# Altium PCB PCB1.PcbDoc
Units mil, origin at the board's own origin, x right, y up, seen from the top; angles counter-clockwise.
Board outline 6000 x 4000 mil, 2 copper layers (Top Layer, Bottom Layer); 48 components, 45 nets, 195 pads, 10 vias.
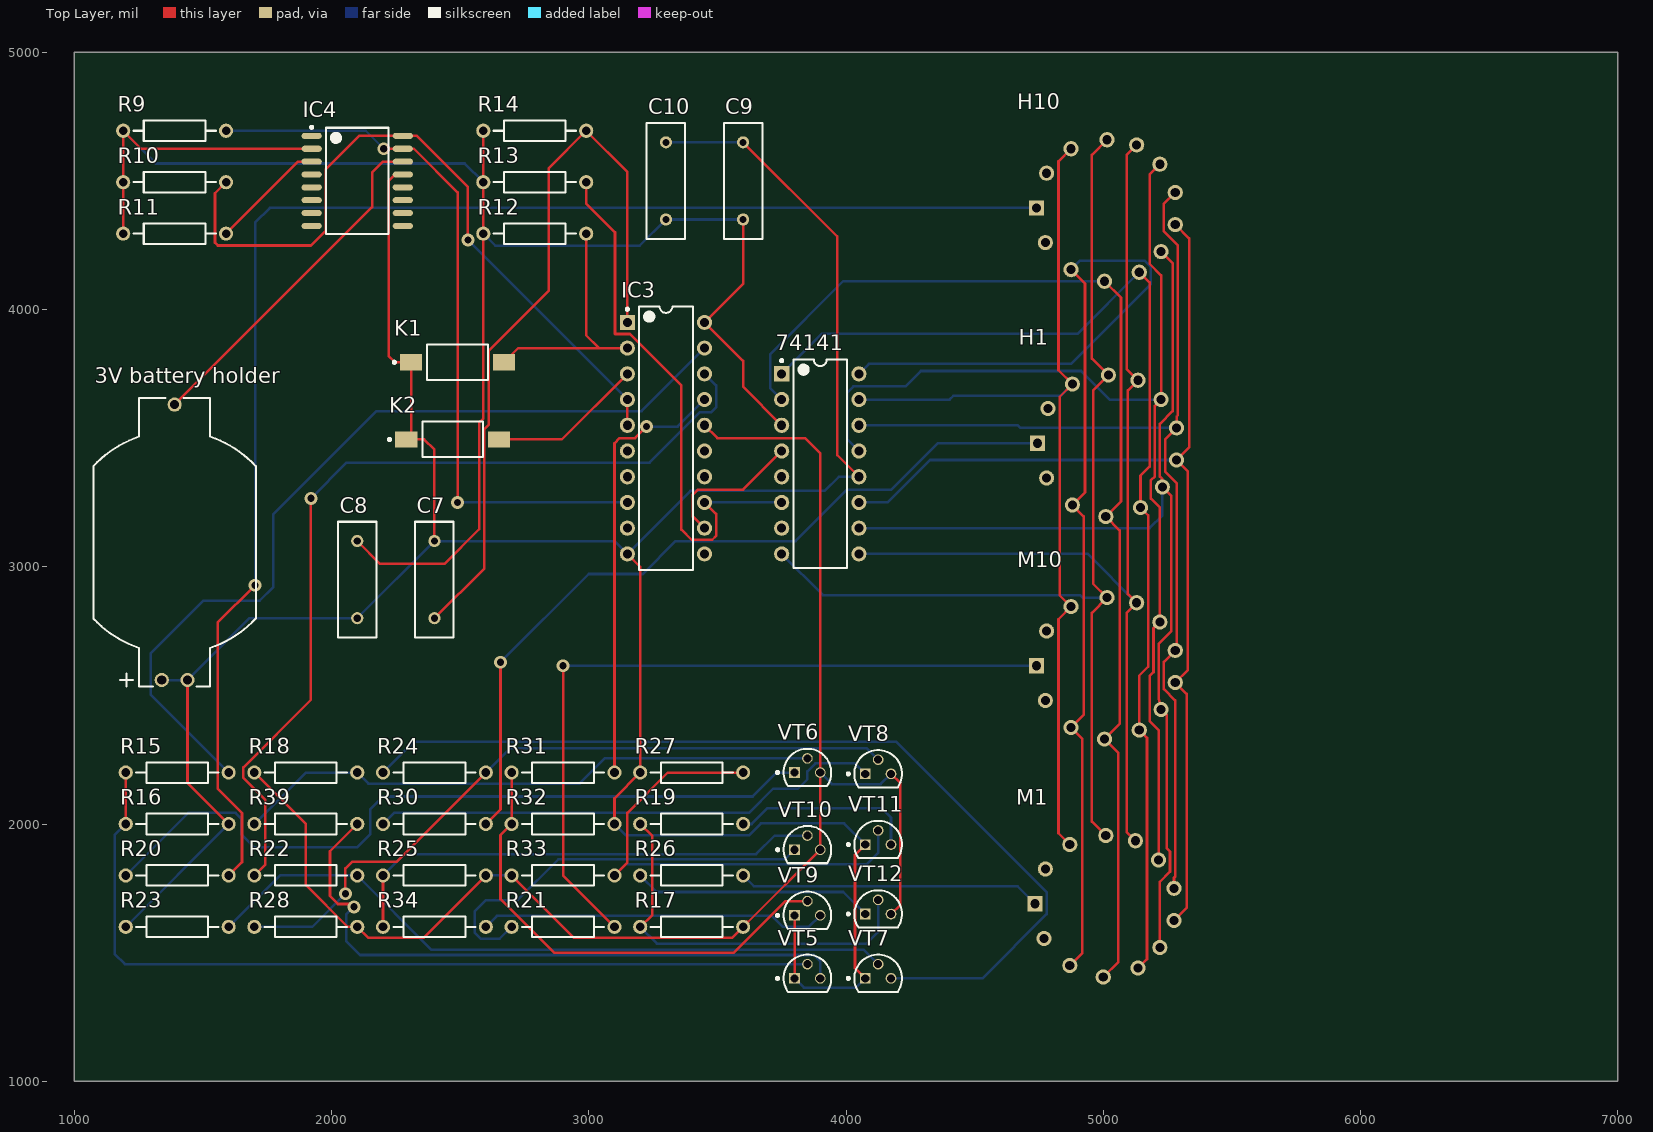
[diagram p0: Top Layer view]
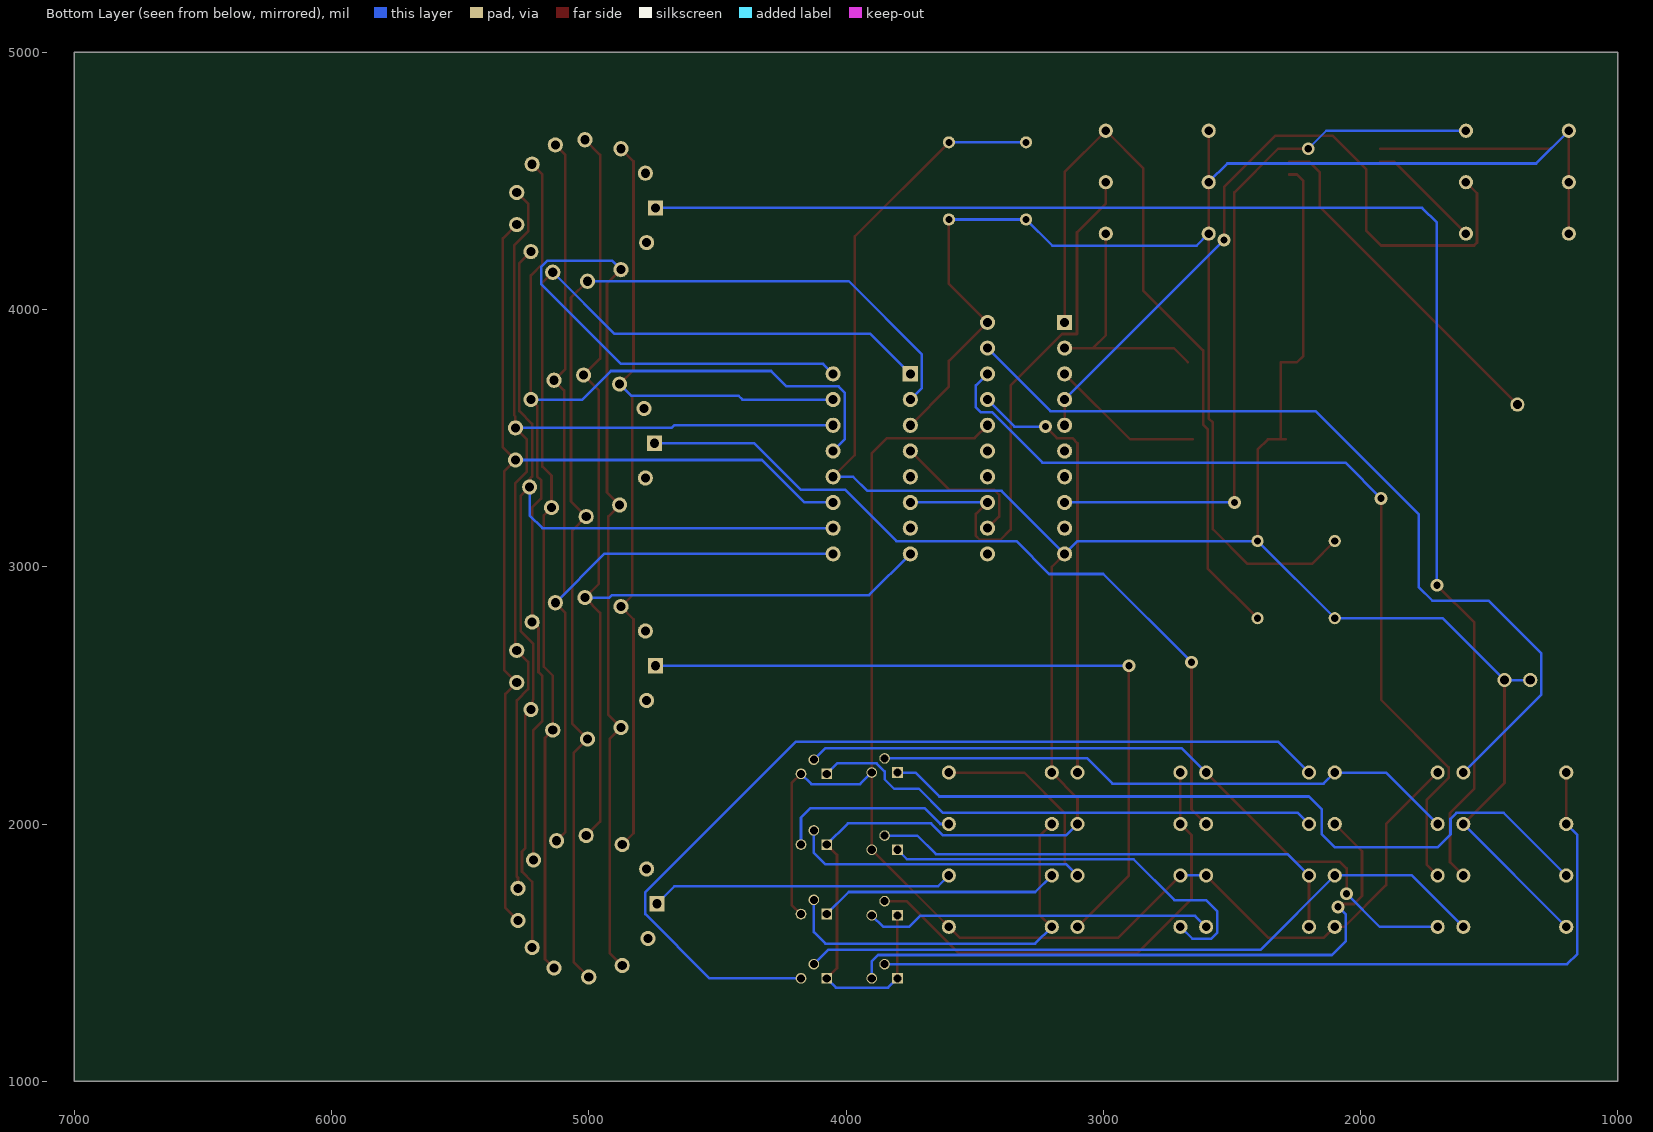
[diagram p1: Bottom Layer view, seen from below]

## Layer stack, top to bottom
Top Solder: solder mask 0.4, Solder Resist, Dk 3.5
Top Layer: signal copper 1.4
Dielectric 1: dielectric 12.6, FR-4, Dk 4.8
Bottom Layer: signal copper 1.4
Bottom Solder: solder mask 0.4, Solder Resist, Dk 3.5

## Board outline
1000,1000 7000,1000 7000,5000 1000,5000

## Design rules (kind name [scope] priority, off if disabled: settings)
Clearance [All] p1: gap=10 ignorepadtopadclearanceinfootprint=FALSE except(0: Arc-Hole Track-Hole SMDPad-Hole THPad-Hole Via-Hole Fill-Hole Poly-Hole Region-Hole Text-Hole)
PolygonConnect [All] p1: connectstyle=Relief reliefconductorwidth=10 reliefentries=4 polygonreliefangle="90 Angle" airgapwidth=10
RoutingVias [All] p1: holewidth=28 width=50 viastyle="Through Hole" minholewidth=28 minwidth=50 maxholewidth=28 maxwidth=50
SolderMaskExpansion [All] p1: expansion=4 istentingtop=FALSE
Width [All] p1: maxlimit=10 minlimit=10 preferedwidth=10
30 further rules are at their usual default settings.

## Classes and differential pairs
net class tb[0..9]: tb0 tb1 tb2 tb3 tb4 tb5 tb6 tb7 tb8 tb9

## Components (designator, comment, footprint, x,y, rotation, side; value= is the part's Value field where it differs from the comment)
"3V battery holder" "CR2032" RENA-HU2032-LF_V 1390,3095 r90 top
74141 "NIXIE_DRIVER_V1" DIP-16 3900,3400 r0 top
C7 "Cap" RAD-0.3 2400,2950 r270 top value=0.1µF
C8 "Cap" RAD-0.3 2100,2950 r90 top value=0.1µF
C9 "Cap" RAD-0.3 3600,4500 r270 top value=0.1µF
C10 "Cap" RAD-0.3 3300,4500 r270 top value=0.1µF
H1 "Header 13" HDR1X13 4800,3930 r270 top
H10 "Header 13" HDR1X13 4795,4845 r270 top
IC3 "ATtiny2313-20PU" 20P3 3300,3500 r0 top
IC4 "DS3231S" W16-H2_L 2100,4500 r0 top
K1 "mode" TECO-FSMSM-2_V 2490,3795 r0 top
K2 "set" TECO-FSMSM-2_V 2470.91,3495 r0 top
M1 "Header 13" HDR1X13 4790,2140 r270 top (schematic designator m1)
M10 "Header 13" HDR1X13 4795,3065 r270 top (schematic designator m10)
R9 "Res2" AXIAL-0.4 1390,4695 r180 top value=5.1K
R10 "Res2" AXIAL-0.4 1390,4495 r180 top value=5.1K
R11 "Res2" AXIAL-0.4 1390,4295 r180 top value=5.1K
R12 "Res2" AXIAL-0.4 2790,4295 r180 top value=1K
R13 "Res2" AXIAL-0.4 2790,4495 r180 top value=1K
R14 "Res2" AXIAL-0.4 2790,4695 r180 top value=1K
R15 "Res2" AXIAL-0.4 1400,2200 r0 top value=10K
R16 "Res2" AXIAL-0.4 1400,2000 r180 top value=10K
R17 "Res2" AXIAL-0.4 3400,1600 r0 top value=10K
R18 "Res2" AXIAL-0.4 1900,2200 r180 top value=10K
R19 "Res2" AXIAL-0.4 3400,2000 r180 top value=1M
R20 "Res2" AXIAL-0.4 1400,1800 r180 top value=10K
R21 "Res2" AXIAL-0.4 2900,1600 r180 top value=10K
R22 "Res2" AXIAL-0.4 1900,1800 r180 top value=10K
R23 "Res2" AXIAL-0.4 1400,1600 r0 top value=10K
R24 "Res2" AXIAL-0.4 2400,2200 r0 top value=1M
R25 "Res2" AXIAL-0.4 2400,1800 r0 top value=10K
R26 "Res2" AXIAL-0.4 3400,1800 r180 top value=10K
R27 "Res2" AXIAL-0.4 3400,2200 r0 top value=10K
R28 "Res2" AXIAL-0.4 1900,1600 r0 top value=10K
R30 "Res2" AXIAL-0.4 2400,2000 r180 top value=10K
R31 "Res2" AXIAL-0.4 2900,2200 r0 top value=10K
R32 "Res2" AXIAL-0.4 2900,2000 r180 top value=10K
R33 "Res2" AXIAL-0.4 2900,1800 r180 top value=10K
R34 "Res2" AXIAL-0.4 2400,1600 r180 top value=1M
R39 "Res2" AXIAL-0.4 1900,2000 r180 top value=1M
VT5 "MPSA42" ONSC-TO-92-3-29-11 3850,1400 r0 top
VT6 "MPSA92" ONSC-TO-92-3-29-11 3850,2200 r0 top
VT7 "MPSA42" ONSC-TO-92-3-29-11 4125,1400 r0 top
VT8 "MPSA92" ONSC-TO-92-3-29-11 4125,2195 r0 top
VT9 "MPSA42" ONSC-TO-92-3-29-11 3850,1645 r0 top
VT10 "MPSA92" ONSC-TO-92-3-29-11 3850,1900 r0 top
VT11 "MPSA42" ONSC-TO-92-3-29-11 4125,1920 r0 top
VT12 "MPSA92" ONSC-TO-92-3-29-11 4125,1650 r0 top

## Footprints (in the part's own frame and the unit in brackets; to place one, negate y for a bottom-side part, rotate by r counter-clockwise, add the part's x,y. Pads: shape width x height; smd on the part's side, far side on the other; paste and mask are expansions set on the pad)
20P3 [mm] "DIP, 20-Pin, Row Spacing 7.62 mm, Pitch 2.54 mm"
  rect 1.5x1.5 hole 0.9: 1(-3.81,11.43)
  round 1.5 hole 0.9: 2(-3.81,8.89) 3(-3.81,6.35) 4(-3.81,3.81) 5(-3.81,1.27) 6(-3.81,-1.27) 7(-3.81,-3.81) 8(-3.81,-6.35) 9(-3.81,-8.89) 10(-3.81,-11.43) 11(3.81,-11.43) 12(3.81,-8.89) 13(3.81,-6.35) 14(3.81,-3.81) 15(3.81,-1.27) 16(3.81,1.27) 17(3.81,3.81) 18(3.81,6.35) 19(3.81,8.89) 20(3.81,11.43)
  silkscreen extent -3.93,-13 2.65,13, body extent -3.6,-12.95 3.6,12.95, height 5.08
AXIAL-0.4 [mm] "Axial Device, Thru-Hole; 2 Leads; 0.4 in Pin Spacing"
  round 1.4 hole 0.85: 1(-5.08,0) 2(5.08,0)
  silkscreen extent -4.06,-1.02 4.06,1.02
DIP-16 [mm] "DIP; 16 Leads; Row Spacing 7.62 mm; Pitch 2.54 mm"
  rect 1.5x1.5 hole 0.9: 1(-3.81,8.89)
  round 1.5 hole 0.9: 2(-3.81,6.35) 3(-3.81,3.81) 4(-3.81,1.27) 5(-3.81,-1.27) 6(-3.81,-3.81) 7(-3.81,-6.35) 8(-3.81,-8.89) 9(3.81,-8.89) 10(3.81,-6.35) 11(3.81,-3.81) 12(3.81,-1.27) 13(3.81,1.27) 14(3.81,3.81) 15(3.81,6.35) 16(3.81,8.89)
  silkscreen extent -3.93,-10.3 2.65,10.31, body extent -3.6,-10.28 3.6,10.28, height 5.08
HDR1X13 [mm] "Connector; Header; 13 Position"
  rect 1.5x1.5 hole 0.9: 1(11.43,-1.397)
  round 1.5 hole 0.9: 2(8.001,-0.381) 3(5.588,2.032) 4(4.699,5.588) 5(5.207,8.509) 6(7.112,10.795) 7(9.906,12.319) 8(13.081,12.319) 9(15.748,10.922) 10(17.78,8.763) 11(18.669,5.334) 12(17.526,2.032) 13(14.859,-0.508)
ONSC-TO-92-3-29-11 [mm] "TO, 3-Leads, Body Dia 4.7mm, Pitch 1.27mm"
  rect 1.05x1.05 hole 0.8: 1(-1.27,0)
  round 1.05 hole 0.8: 2(0,1.397) 3(1.27,0)
  silkscreen extent -3.07,-1.34 2.35,2.35, body extent -2.35,-1.33 2.36,2.36, height 7.87
RAD-0.3 [mm] "Radial Cap, Thru-Hole; 2 Leads; 0.3 in Pin Spacing"
  round 1.2 hole 0.7: 1(-3.81,0) 2(3.81,0)
  silkscreen extent -5.71,-1.91 5.71,1.91
RENA-HU2032-LF_V [mm] "THD, 3-Leads, Body 28.5x16.05mm"
  round 1.4 hole 0.9: 1(-13.6,1.27) 2(-13.6,-1.27) 3(13.6,0)
  silkscreen extent -14.25,-8.03 14.25,8.03, body extent -14.25,-8.03 14.25,8.03, height 5.35
TECO-FSMSM-2_V [mm] "SMD, 2-Leads, Body 6x3.5mm, Pitch 9.19mm"
  rect 2.2x1.6 smd: 1(-4.595,0)
  rect 2.18x1.6 smd: 2(4.595,0)
  silkscreen extent -6.37,-1.75 3,1.75, body extent -4.98,-1.75 4.98,1.75, height 4.4
W16-H2_L [mm] "SOIC, 16-Leads, Body 10.3x7.5mm, Pitch 1.27mm, IPC High Density"
  oval 2x0.6 smd: 1(-4.5,4.445) 2(-4.5,3.175) 3(-4.5,1.905) 4(-4.5,0.635) 5(-4.5,-0.635) 6(-4.5,-1.905) 7(-4.5,-3.175) 8(-4.5,-4.445) 9(4.5,-4.445) 10(4.5,-3.175) 11(4.5,-1.905) 12(4.5,-0.635) 13(4.5,0.635) 14(4.5,1.905) 15(4.5,3.175) 16(4.5,4.445)
  silkscreen extent -4.62,-5.25 3.1,5.42, body extent -3.8,-5.25 3.8,5.25, height 2.65

## Part data
"3V battery holder": library part CMP-2000-06429-1, "Coin Cell Battery Holder, CR2032, Horizontal, -40 to 100 degC, 3-Pin THD, RoHS, Tray", Manufacturer=Renata, Package Description="3-Pin Through Hole Device, Body 28.5 x 16.05 mm", Package Reference=HU2032-LF, Battery Cell Size=20mm, Brand=Renata, Contact Plating=Nickel, Datasheet URL=http://www.renata.com/fileadmin/downloads/productsheets/battery_holders/HU2032-LF.pdf, Datasheet Version="Rev. 2, 09/2010", Dimensions=28.5mmx16.1mmx5.2mm, Factory Pack Quantity=500, Manufacturer URL=http://www.renata.com/, Material=LiquidCrystalPolymer(LCP), Mounting Style=ThroughHole, Mounting Technology=ThroughHole, Product=BatteryHolders, Product Category=CoinCellBatteryHolders, RoHS=Details, Termination Style=SolderPins, Type=BatteryHolder
C7 C8 C9 C10: "Capacitor", LatestRevisionDate=17-Jul-2002, LatestRevisionNote="Re-released for DXP Platform.", PackageDescription="Radial Cap, Thru-Hole; 2 Leads; 0.3 in Pin Spacing", PackageReference=RAD-0.3, Published=8-Jun-2000, Publisher="Altium Limited"
H1 H10 M1 M10: "Header, 13-Pin", LatestRevisionDate=17-Jul-2002, LatestRevisionNote="Re-released for DXP Platform.", Publisher="Altium Limited"
IC3: library part CMP-0093-00018-2, "Low Power tinyAVR® 8-Bit Microcontroller, 2.7-5.5V, 20MHz, 2K Flash Memory, Industrial Grade (-40°C to 85°C), 20-Lead PDIP, Pb-Free", Code_JEDEC=MS-001-AD, ComponentLink1Description="Manufacturer URL", ComponentLink1URL=http://www.atmel.com/, ComponentLink2Description="ATtiny2313 Datasheet", ComponentLink2URL=http://www.atmel.com/dyn/resources/prod_documents/doc2543.pdf, ComponentLink3Description="ATtiny2313 Summary", ComponentLink3URL=http://www.atmel.com/dyn/resources/prod_documents/doc2543S.pdf, DatasheetVersion="revL, Aug-2010", PackageDescription="20-lead (0.300\"/7.62mm Wide) Plastic Dual Inline Package (PDIP)", PackageReference=20P3, PackageVersion="revD, Oct-2010", RevisionNote="DatasheetVersion & PackageVersion updated. URLs added."
IC4: library part CMP-0254-00244-1, "Extremely Accurate I2C-Integrated Real-Time Clock/TCXO/Crystal, 16-Pin SO, 0 to 70 degC", Code_IPC=SOIC127P1030-16, Code_JEDEC=MS-013-AA, ComponentLink1Description="Manufacturer URL", ComponentLink1URL=http://www.maxim-ic.com, ComponentLink2Description=Datasheet, ComponentLink2URL=http://datasheets.maxim-ic.com/en/ds/DS3231.pdf, ComponentLink3Description="Package Specification", ComponentLink3URL=http://pdfserv.maxim-ic.com/package_dwgs/21-0042.PDF, DatasheetVersion="Rev 8, Jul-2010", PackageDescription="16-Pin Small-Outline IC, Wide (0.3in), 1.27 mm Pitch, SOIC (W)", PackageReference=W16-H2, PackageVersion="revD, 2010"
K1 K2: library part CMP-2000-07511-1, "FSMSM Push Button Switch, 50 mA, -35 to 85 degC, 2-Pin SMD, RoHS, Bulk", Case\/Package=SMD/SMT, Contact Current Rating=50mA, Contact Resistance=100mOhm, Manufacturer="TE Connectivity", Max Operating Temperature=85degC, Max Voltage Rating (DC)=12V, Min Operating Temperature=-35degC, Operating Force=180gf, Package Description="2-Pin Surface Mount Device, Body 6 x 3.5 mm, Pitch 9.19 mm", Package Quantity=1000, Package Reference=FSMSM, Voltage Rating (DC)=24V, Actuator Length=1.07mm, Actuator Material=Polyamide, Contact Material=Brass, Contact Plating=Silver, Current Rating=50mA, Datasheet URL=http://www.te.com/commerce/DocumentDelivery/DDEController?Action=showdoc&DocId=Customer+Drawing%7F1437566-3%7FC2%7Fpdf%7FEnglish%7FENG_CD_1437566-3_C2_1437566_3_1_c.dwg.pdf%7F1437566-3, Datasheet Version="Rev. C2, 08/2014", Electrical Life=20000Cycles, ELV=Compliant, Illumination Type=Illuminated, Lead Free=LeadFree, Manufacturer URL=http://www.te.com/, Mechanical Life=20000Cycles, Mount=SurfaceMount, Mounting Technology=SurfaceMount, Orientation=Straight, Packaging=LoosePiece, REACH SVHC=Unknown, RoHSCompliant=true, Switch Travel=0.25mm, Termination=GullWing, Throw Configuration=SPST
R9 R10 R11 R12 R13 R14 R15 R16 R17 R18 R19 R20 R21 R22 R23 R24 R25 R26 R27 R28 R30 R31 R32 R33 R34 R39: "Resistor", LatestRevisionDate=17-Jul-2002, LatestRevisionNote="Re-released for DXP Platform.", PackageDescription="Axial Device, Thru-Hole; 2 Leads; 0.4 in Pin Spacing", PackageReference=AXIAL-0.4, Published=8-Jun-2000, Publisher="Altium Limited"
VT5 VT7 VT9 VT11: library part CMP-1048-01390-1, "High Voltage Transistor, NPN Silicon, 3-Pin TO-92, Bulk Box", Manufacturer="On Semiconductor", ComponentLink1Description="Manufacturer URL", ComponentLink1URL=http://www.onsemi.com/, ComponentLink2Description=Datasheet, ComponentLink2URL=http://www.onsemi.cn/pub_link/Collateral/MPSA42-D.PDF, ComponentLink3Description="Package Specification", ComponentLink3URL=http://www.onsemi.cn/pub_link/Collateral/2N6426-D.PDF, DatasheetVersion="Rev. 8", fT Min (MHz)=50, IC Continuous (A)=0.5, Mounting Technology="Through Hole", Note1=0, PackageDescription="3-Pin Transistor Outline, Body 4.825 x 3.685 mm, Pitch 1.27 mm", PackageReference=TO-92-3-29-11_AM_SL, PackageVersion="Rev. AM", Packing="Bulk Box", PartNumber=MPSA42, Polarity=NPN, RoHS=FALSE
VT6 VT8 VT10 VT12: library part CMP-1048-01411-1, "High Voltage Transistor, PNP Silicon, 3-Pin TO-92, Bulk Box", Manufacturer="On Semiconductor", ComponentLink1Description="Manufacturer URL", ComponentLink1URL=http://www.onsemi.com/, ComponentLink2Description=Datasheet, ComponentLink2URL=http://www.onsemi.cn/pub_link/Collateral/MPSA92-D.PDF, ComponentLink3Description="Package Specification", ComponentLink3URL=http://www.onsemi.cn/pub_link/Collateral/2N6426-D.PDF, DatasheetVersion="Rev. 6", fT Min (MHz)=50, IC Continuous (A)=-0.5, Mounting Technology="Through Hole", PackageDescription="3-Pin Transistor Outline, Body 4.825 x 3.685 mm, Pitch 1.27 mm", PackageReference=TO-92-3-29-11_AM_SL, PackageVersion="Rev. AM", Packing="Bulk Box", PartNumber=MPSA92, Polarity=PNP, RoHS=FALSE
74141: DeviceName="Nixie Driver", DeviceSetName=NIXIE_DRIVER_V1, LibraryName=Nixie_Tube_Driver_Altium_Library, SymbolName_1=NIXIE_DRIVER_V1

## Via types
v1: diameter 50, hole 28, Top Layer to Bottom Layer, 10 vias

## Nets (pads, with @x,y where several pads share a name; then routed paths per layer and width w, separated by ;. In a path a pad name is that pad's centre, name@x,y a point inside that pad or via, vN(x,y) a via of type N, cw(c..) or ccw(c..) an arc to the next point about the centre after c; other vN are vias at no path point)
GND: 74141.12 "3V battery holder.1" "3V battery holder.2" C7.1 C8.1 C9.1 C10.1 IC3.10 IC4.13 K1.1 K2.1 R16.1 R23.1 R27.1 R32.1 VT5.1 VT7.1 VT9.1 VT11.1 | length 10942.1
  Top Layer w10: 1440,2559.57 1440,2160 R16.1 ; IC4.13 2247,4525 2222,4500 2222,3820 2247,3795 K1.1 K2.1@2309.09,3495 ; K2.1 K2.1@2309.09,3495 ; C7.1 2400,3455 2360,3495 K2.1@2309.09,3495 ; R32.1 3100,2100 R27.1 3200,3000 IC3.10 ; C9.1 3966,4284 3966,3434 74141.12 ; VT5.1 VT9.1 ; VT7.1 4035,1440 4035,1880 VT11.1
  Bottom Layer w10: R23.1 R16.1 ; 1340,2559.57 1440,2559.57 1680.43,2800 C8.1 C7.1 3100,3100 IC3.10 3395,3295 3917,3295 3972,3350 74141.12 ; R32.1 3143,1957 3624,1957 3669.38,2002.38 3992.62,2002.38 VT11.1 ; C10.1 C9.1 ; VT5.1 3836,1364 4039,1364 VT7.1
"Net3V battery holder_3": "3V battery holder.3" IC4.14 | length 1357.2
  Top Layer w10: 1390,3630.43 2158,4398.43 2158,4533 2200,4575 IC4.14
Net74141_3: 74141.3 C8.2 C9.2 C10.2 IC3.20 IC4.2 R9.2 R10.2 R11.2 R12.2 R13.2 R14.2 | length 6825.2
  Top Layer w10: R11.2 R10.2 R9.2 1260,4625 IC4.2 ; C8.2 2189,3011 2439,3011 2573.9,3145.9 2573.9,3560 2590,3576.1 R12.2 R13.2 R14.2 ; C9.2 3600,4100 IC3.20 3600,3800 3600,3700 74141.3
  Bottom Layer w10: R9.2 1317.17,4567.83 2517.17,4567.83 R13.2 ; R12.2 2637,4248 3198,4248 C10.2 C9.2
Net74141_4: 74141.4 IC3.12 | length 564.1
  Top Layer w10: IC3.12 3405,3195 3405,3280 3425,3300 3600,3300 74141.4
Net74141_6: 74141.6 IC3.13 R13.1 | length 2143.7
  Top Layer w10: R13.1 2990,4412 3102,4300 3102,3905 3160,3905 3360,3705 3360,3145 3400,3105 3480,3105 3495,3120 3495,3205 IC3.13
  Bottom Layer w10: IC3.13 74141.6
NetC7_2: C7.2 IC3.1 R14.1 | length 2950.7
  Top Layer w10: C7.2 2593.9,2993.9 2593.9,3535.39 2612,3553.5 2612,3841 2845,4074 2845,4550 R14.1 3150,4535 IC3.1
NetH1_1: H1.1 R30.1 | length 3093.1
  Top Layer w10: R30.1 2657,2057 v1(2657,2629)
  Bottom Layer w10: v1(2657,2629) 3000,2972 3210,2972 3338,3100 3804,3100 4004,3300 4176,3300 4356,3480 H1.1
NetH10_1: H10.1 R20.1 | length 5719.6
  Top Layer w10: R20.1 1652,1852 1652,2042.88 1557.44,2137.44 1557.44,2782.44 v1(1703,2928)
  Bottom Layer w10: v1(1703,2928) 1703,4338 1760,4395 H10.1
NetIC3_2: IC3.2 K1.2 R12.1 | length 967.6
  Top Layer w10: K1.2 2725.91,3850 3040,3850 ; R12.1 2990,3900 3040,3850 ; IC3.2 3040,3850
NetIC3_3: IC3.3 K2.2 | length 603.8
  Top Layer w10: K2.2 2895,3495 IC3.3
NetIC3_4: IC3.4 IC3.5 IC4.16 R10.1 | length 2822.7
  Top Layer w10: R10.1 1547,4452 1547,4260 1558,4249 1920,4249 1978,4307 1978,4546 2107,4675 IC4.16 2332,4675 2530,4477 v1(2530,4270) ; IC3.5 IC3.4
  Bottom Layer w10: v1(2530,4270) IC3.4
NetIC3_8: IC3.8 IC4.15 R9.1 | length 2864.4
  Top Layer w10: v1(2203,4625) IC4.15 2320,4625 2490,4455 v1(2490,3250)
  Bottom Layer w10: R9.1 2133,4695 v1(2203,4625) ; v1(2490,3250) IC3.8
NetIC3_16: IC3.16 R17.2 R18.2 R25.2 R28.2 R33.2 VT6.3 VT8.3 VT10.3 VT12.3 | length 5880.9
  Top Layer w10: R18.2 1900,2000 1900,1763 2063,1600 R28.2 2143,1557 2357,1557 R25.2 ; R33.2 2943,1557 3557,1557 R17.2 3600,1620 3620,1620 VT10.3 VT6.3 3900,3440 3840,3500 3500,3500 IC3.16 ; VT12.3 4211,1686 4211,2159 VT8.3
  Bottom Layer w10: R25.2 R33.2 ; VT6.3 3945,2155 4135,2155 VT8.3
NetIC3_17: IC3.17 R31.2 | length 1700.4
  Top Layer w10: R31.2 3100,3480 3120,3500 3180,3500 v1(3225,3545)
  Bottom Layer w10: v1(3225,3545) 3345,3545 IC3.17
NetIC3_18: IC3.18 R22.2 | length 3498.3
  Top Layer w10: R22.2 1743,1843 1743,2094 1657.44,2179.56 1657.44,2220.44 1920,2483 v1(1920,3266)
  Bottom Layer w10: v1(1920,3266) 2059,3405 3236,3405 3431,3600 3475,3600 3495,3620 3495,3705 IC3.18
NetIC3_19: IC3.19 R15.2 | length 3398.4
  Bottom Layer w10: R15.2 1297,2503 1297,2662 1503,2868 1721,2868 1773,2920 1773,3203 2175,3605 3205,3605 IC3.19
NetIC4_3: IC4.3 R11.1 | length 448.8
  Top Layer w10: R11.1 1870,4575 IC4.3
Netm1_1: M1.1 R26.1 | length 1180.6
  Bottom Layer w10: R26.1 3642,1758 4667,1758 M1.1
Netm10_1: M10.1 R21.1 | length 2937.8
  Top Layer w10: v1(2900,2615) 2900,1800 R21.1
  Bottom Layer w10: v1(2900,2615) M10.1
NetR15_1: R15.1 R16.2 VT5.2 | length 3432.4
  Top Layer w10: R16.2 R15.1
  Bottom Layer w10: R16.2 1157,1957 1157,1495 1197,1455 VT5.2
NetR17_1: R17.1 R19.2 VT12.2 | length 1534.5
  Top Layer w10: R17.1 3247,1647 3247,1953 R19.2
  Bottom Layer w10: R17.1 3265,1535 4080,1535 4125,1580 VT12.2
NetR18_1: R18.1 R39.2 VT6.2 | length 2291.2
  Bottom Layer w10: R39.2 1900,2200 R18.1 2143,2157 2964,2157 3062,2255 VT6.2
NetR19_1: R19.1 VT11.3 | length 721
  Bottom Layer w10: R19.1 3633.25,2000 3695.25,2062 4138,2062 4175,2025 VT11.3
NetR20_2: R20.2 VT6.1 | length 2968.7
  Bottom Layer w10: R20.2 1443,2043 1627,2043 1650,2020 1650,1960 1701,1909 2099,1909 2150,1960 2150,2057 2200,2107 3637,2107 3730,2200 VT6.1
NetR21_2: R21.2 VT10.1 | length 1597.6
  Bottom Layer w10: R21.2 2654,1554 2580,1554 2557,1577 2557,1661 2600,1704 2723,1704 2882,1863 3763,1863 VT10.1
NetR22_1: R22.1 R23.2 VT7.2 | length 2750.7
  Bottom Layer w10: R23.2 1800,1800 R22.1 2389.33,1510.67 4069.33,1510.67 VT7.2
NetR24_1: R24.1 VT7.3 | length 3664.7
  Bottom Layer w10: R24.1 2319,2319 4196,2319 4780,1735 4780,1650 4530,1400 VT7.3
NetR24_2: R24.2 R28.1 VT8.2 | length 2788.1
  Top Layer w10: v1(2054,1729) 2054,1827 2080,1853 2253,1853 R24.2
  Bottom Layer w10: R28.1 1925,1600 v1(2054,1729) ; R24.2 2694,2294 4081,2294 VT8.2
NetR25_1: R25.1 R34.2 VT10.2 | length 1914.2
  Top Layer w10: R34.2 R25.1
  Bottom Layer w10: R25.1 2283,1883 3651,1883 3723,1955 VT10.2
NetR26_2: R26.2 VT12.1 | length 937.1
  Bottom Layer w10: R26.2 3264.33,1735.67 3989.33,1735.67 VT12.1
NetR27_2: R27.2 R33.1 VT11.2 | length 1927.2
  Top Layer w10: R33.1 3150,1850 3150,2043 3307,2200 R27.2
  Bottom Layer w10: R33.1 3143,1843 4080,1843 4125,1888 VT11.2
NetR30_2: R30.2 VT8.1 | length 2007.4
  Bottom Layer w10: R30.2 2243,2043 3622.92,2043 3716.92,2137 3813,2137 3850,2174 3850,2204.55 3881.12,2235.67 4034.33,2235.67 VT8.1
NetR31_1: R31.1 R32.2 VT9.2 | length 1871.8
  Top Layer w10: R31.1 R32.2 2657,1957 2657,1708 2865,1500 3564,1500 3764,1700 VT9.2
NetR34_1: R34.1 VT9.3 | length 1354.3
  Bottom Layer w10: R34.1 2643,1643 3712,1643 3755,1600 3855,1600 VT9.3
NetR39_1: R39.1 VT5.3 | length 2521.5
  Top Layer w10: v1(2087,1678) 2076,1689 2025,1689 1994,1720 1994,1894 R39.1
  Bottom Layer w10: v1(2087,1678) 2057,1648 2057,1545 2111.33,1490.67 3875.33,1490.67 3900,1466 VT5.3
tb0: 74141.16 H1.12 H10.12 M1.12 M10.12 | length 4504.5
  Top Layer w10: M1.12 4919,1499 4919,2331 M10.12 4924,2424 4924,3196 H1.12 4929,3289 4929,4101 H10.12
  Bottom Layer w10: 74141.16 4089,3789 4874,3789 5185,4100 5185,4165 5160,4190 4910,4190 H10.12
tb1: 74141.15 H1.3 H10.3 M1.3 M10.3 | length 3679.6
  Top Layer w10: M1.3 4826,1964 4826,2796 M10.3 4831,2889 4831,3661 H1.3 4826,3764 4826,4576 H10.3
  Bottom Layer w10: 74141.15 4403,3650 4417,3664 4834,3664 H1.3
tb2: 74141.8 H1.4 H10.4 M1.4 M10.4 | length 4185
  Top Layer w10: M1.4 4956,2009 4956,2821 M10.4 4961,2934 4961,3686 H1.4 4956,3809 4956,4601 H10.4
  Bottom Layer w10: 74141.8 3910,2890 4910,2890 4920,2880 M10.4
tb3: 74141.9 H1.5 H10.5 M1.5 M10.5 | length 3958.6
  Top Layer w10: M1.5 5091,1969 5091,2821 M10.5 5096,2894 5096,3686 H1.5 5091,3769 5091,4601 H10.5
  Bottom Layer w10: 74141.9 4940,3050 M10.5
tb4: 74141.13 H1.6 H10.6 M1.6 M10.6 | length 4348.4
  Top Layer w10: M1.6 5215,2365 5180,2400 5180,2574.53 5195.47,2590 5195.47,2760.47 M10.6 5220,3230.47 5185.47,3265 5185.47,3336.47 5200.47,3351.47 5200.47,3625.47 H1.6 5225,4133 5180,4178 5180,4525 H10.6
  Bottom Layer w10: 74141.13 4005,3495 4005,3677 4029,3701 4231,3701 4291,3761 4914,3761 5025,3650 H1.6
tb5: 74141.14 H1.7 H10.7 M1.7 M10.7 | length 4068.1
  Top Layer w10: M1.7 5275,1790.94 5279.53,1795.47 5279.53,2480 5235.47,2524.06 5235.47,2630.47 M10.7 5280,2698 5285,2698 5285,3325.47 5240.47,3370 5240.47,3495.47 H1.7 5285,3584 5290,3589 5290,4249.53 5235,4304.53 5235,4410 H10.7
  Bottom Layer w10: 74141.14 4668,3550 4678,3540 H1.7
tb6: 74141.11 H1.8 H10.8 M1.8 M10.8 | length 4128.1
  Top Layer w10: M1.8 5324,1674 5324,2506 M10.8 5329,2599 5329,3371 H1.8 5334,3464 5334,4276 H10.8
  Bottom Layer w10: 74141.11 4162,3250 4327,3415 H1.8
tb7: 74141.10 H1.9 H10.9 M1.9 M10.9 | length 4125.6
  Top Layer w10: M1.9 5220,1775.47 5259.53,1815 5259.53,1892.47 5247,1905 5247,2423 M10.9 5215.47,2487.53 5215.47,2700 5265,2749.53 5265,3275 H1.9 5230,3340.94 5220.47,3350.47 5220.47,3555.47 5270,3605 5270,4180 H10.9
  Bottom Layer w10: 74141.10 5180,3150 5230,3200 H1.9
tb8: 74141.1 H1.10 H10.10 M1.10 M10.10 | length 4343.5
  Top Layer w10: M1.10 5170,1475 5170,2335 M10.10 5140,2577 5175,2612 5175,3200 H1.10 5145,3354.06 5180,3389.06 5180,4105 H10.10
  Bottom Layer w10: 74141.1 3905.33,3905.33 4900.33,3905.33 H10.10
tb9: 74141.2 H1.11 H10.11 M1.11 M10.11 | length 4461.8
  Top Layer w10: M1.11 5059,1464 5059,2276 M10.11 5064,2389 5064,3141 H1.11 5069,3254 5069,4046 H10.11
  Bottom Layer w10: 74141.2 3705,3695 3705,3826 3989,4110 H10.11
pads on no net: 74141.5 74141.7 H1.2 H1.13 H10.2 H10.13 IC3.6 IC3.7 IC3.9 IC3.11 IC3.14 IC3.15 IC4.1 IC4.4 IC4.5 IC4.6 IC4.7 IC4.8 IC4.9 IC4.10 IC4.11 IC4.12 M1.2 M1.13 M10.2 M10.13

## Silkscreen, mask and mechanical layers (free items; w line width, h text height)
board outline:
  lines w10: 1000,1000 5525,1000 5525,5000 1000,5000 1000,1000